# EAGLE board ftdi - Copy (EAGLE 6.5.0)
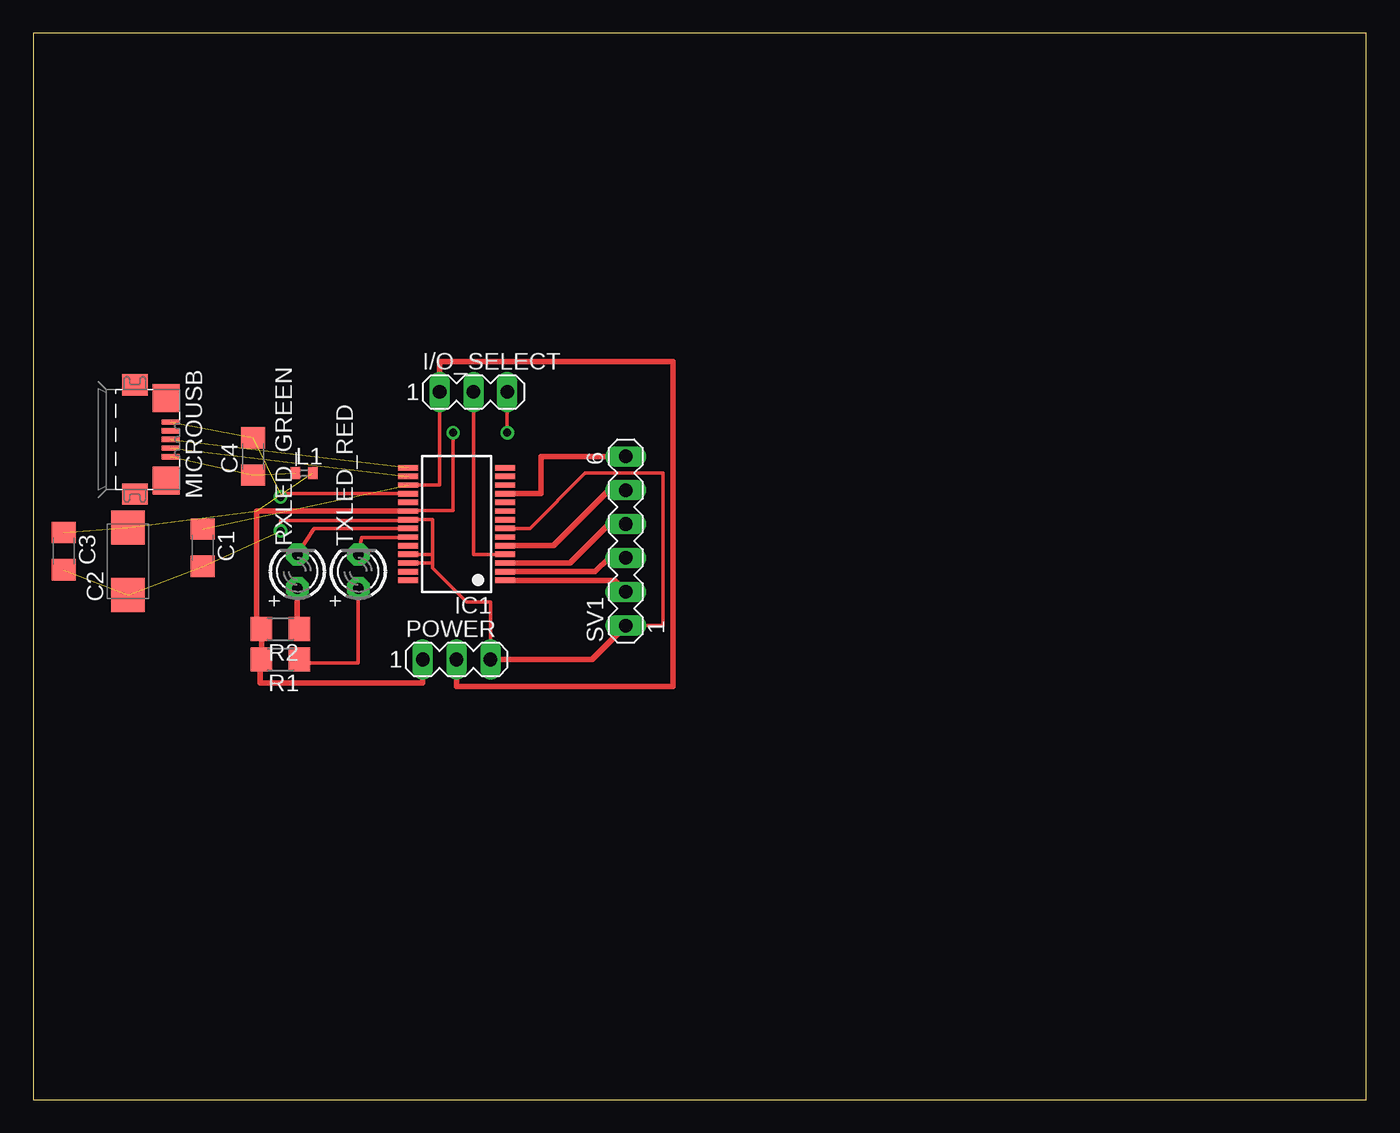
[diagram p0: board, top side]
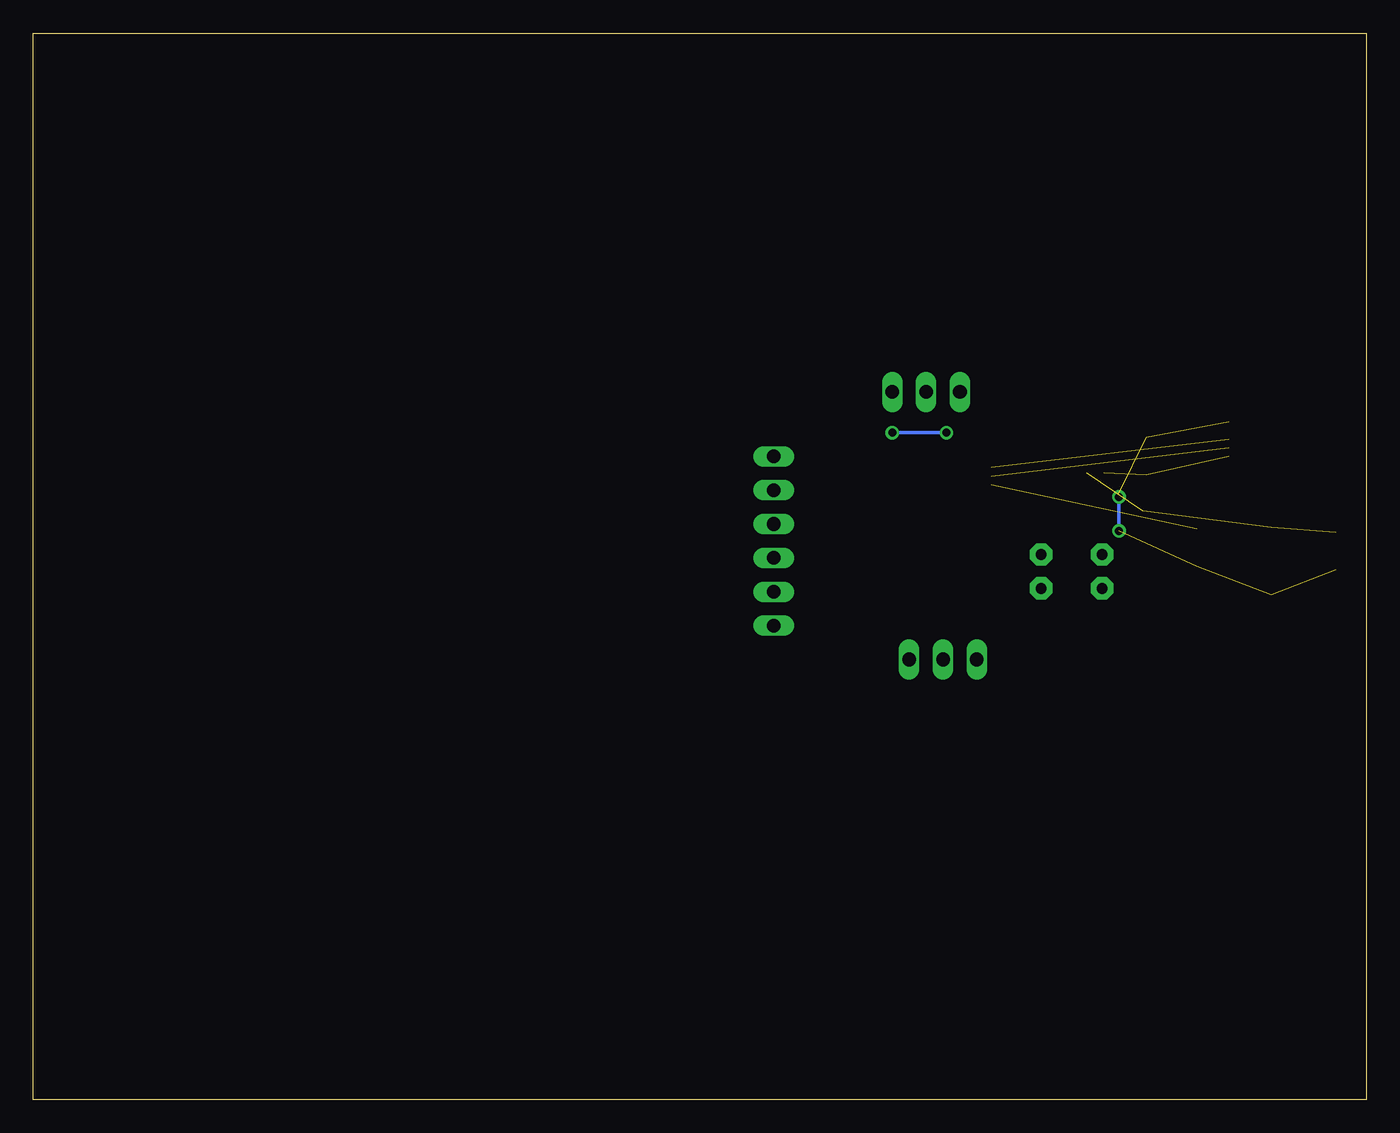
[diagram p1: board, bottom side, seen from below]

Size 100 x 80 mm. Coordinates in mm from the lower left corner, seen from the top.
Outline: 0,0 100,0 100,80 0,80 0,0
Copper layers (1*16): Top 0.035mm / dielectric 1.5mm / Bottom 0.035mm
Design rules "default": minimum track width 10mil, minimum drill 24mil, track to track 8mil, track to pad 8mil, pad to pad 8mil, via to via 8mil, smd to smd 8mil, copper to edge 40mil, drill to drill 8mil, minimum pad ring 10mil, minimum via ring 8mil, stop-mask expansion 4mil, vias tented up to drill 0mil, thermal gap 10mil

## Footprints (pad centres in the part's own frame; a part is rotated, then mirrored left to right if it is on the bottom)
C1206 = smd 1.6 x 1.8: 1 -1.4,0; 2 1.4,0
C/6032-28R = smd 2.55 x 2.5: + 2.525,0; - -2.525,0
MA03-1 = drill 1.016 long: 1 -2.54,0; 2 0,0; 3 2.54,0
SSOP28 = smd 0.4 x 1.5: 1 -4.225,-3.625; 2 -3.575,-3.625; 3 -2.925,-3.625; 4 -2.275,-3.625; 5 -1.625,-3.625; 6 -0.975,-3.625; 7 -0.325,-3.625; 8 0.325,-3.625; 9 0.975,-3.625; 10 1.625,-3.625; 11 2.275,-3.625; 12 2.925,-3.625; 13 3.575,-3.625; 14 4.225,-3.625; 15 4.225,3.625; 16 3.575,3.625; 17 2.925,3.625; 18 2.275,3.625; 19 1.625,3.625; 20 0.975,3.625; 21 0.325,3.625; 22 -0.325,3.625; 23 -0.975,3.625; 24 -1.625,3.625; 25 -2.275,3.625; 26 -2.925,3.625; 27 -3.575,3.625; 28 -4.225,3.625
0402 = smd 0.7 x 0.9: 1 -0.65,0; 2 0.65,0
ZX62R-B-5P = smd 1.35 x 0.4: 1 2.675,-1.3; 2 2.675,-0.65; 3 2.675,0; 4 2.675,0.65; 5 2.675,1.3 | smd 1.9 x 1.6: M1 0,-4.1; M2 0,4.1 | smd 2 x 2.1: M3 2.35,3.1; M4 2.35,-3.1
R1206 = smd 1.6 x 1.803: 1 -1.422,0; 2 1.422,0
LED3MM = drill 0.813 pad 1.676 octagon: A -1.27,0; K 1.27,0
MA06-1 = drill 1.016 long: 1 -6.35,0; 2 -3.81,0; 3 -1.27,0; 4 1.27,0; 5 3.81,0; 6 6.35,0

## Placement (x,y rotation side)
C1  100nF  [C1206]  12.7,41.4 270 top
C2  4.7uF TANTALUM  [C/6032-28R]  7.11,40.39 90 top
C3  100nF  [C1206]  2.29,41.15 270 top
C4  10nF  [C1206]  16.51,48.26 90 top
I/O_SELECT  [MA03-1]  33.02,53.09 0 top
IC1  FT232RL  [SSOP28]  31.75,43.18 90 top
L1  Ferrite bead  [0402]  20.32,46.99 0 top
MICROUSB  MICRO-USB-ZX62R-B-5P  [ZX62R-B-5P]  7.62,49.53 0 top
POWER  [MA03-1]  31.75,33.02 0 top
R1  270ohm  [R1206]  18.54,33.02 180 top
R2  270ohm  [R1206]  18.54,35.31 180 top
RXLED_GREEN  [LED3MM]  19.81,39.62 90 top
SV1  [MA06-1]  44.45,41.91 90 top
TXLED_RED  [LED3MM]  24.38,39.62 90 top

## Library data of the parts
C1-C4 R1 R2 RXLED_GREEN TXLED_RED = adafruit
I/O_SELECT POWER SV1 = con-lstb; OC_FARNELL: unknown; OC_NEWARK: unknown
IC1 = ftdichip; MPN: FT232RL; OC_FARNELL: 1146032; OC_NEWARK: 91K9918
L1 = inductors
MICROUSB = con-hirose

## Nets
3.3V: C1.1 I/O_SELECT.1 IC1.17 POWER.2
GND: C1.2 C2.- C3.2 C4.2 IC1.7 IC1.18 IC1.21 IC1.25 IC1.26 MICROUSB.5 POWER.3 SV1.1
N$1: IC1.1 SV1.2
N$2: IC1.16 MICROUSB.2
N$3: IC1.15 MICROUSB.3
N$4: IC1.23 TXLED_RED.K
N$5: C4.1 L1.1 MICROUSB.1
N$6: I/O_SELECT.2 IC1.4
N$7: R1.1 TXLED_RED.A
N$8: R2.1 RXLED_GREEN.A
N$9: IC1.2 SV1.3
N$10: IC1.3 SV1.4
N$11: IC1.5 SV1.5
N$12: IC1.11 SV1.6
RXLED_RED: IC1.22 RXLED_GREEN.K
VCC: C2.+ C3.1 I/O_SELECT.3 IC1.20 L1.2 POWER.1 R1.2 R2.2

## Tracks (layer width: path | path; a pad name or v marks a point on that pad's centre or on a via)
3.3V  (1 unrouted)
  Top 0.254: IC1.17 30.48,46.1 I/O_SELECT.1
  Top 0.406: POWER.2 31.75,30.99 48.01,30.99 48.01,55.37 30.48,55.37 I/O_SELECT.1
GND  (via drill 0.6)  (5 unrouted)
  Top 0.254: IC1.7 37.27,42.85 41.4,46.99 47.24,46.99 47.24,35.56 SV1.1 | 29.97,40.91 29.97,43.51 IC1.21 27.94,43.43 18.54,43.43 v18.54,42.67 | 29.97,40.91 29.97,40.26 | 29.97,40.26 29.97,39.88 32.51,37.34 34.29,37.34 POWER.3 | IC1.26 29.97,40.26 | IC1.25 29.97,40.91 | v18.54,45.21 18.54,45.47 28.11,45.47 IC1.18
  Top 0.406: POWER.3 41.91,33.02 SV1.1
  Bottom 0.254: v18.54,42.67 v18.54,45.21
N$1
  Top 0.406: IC1.1 43.59,38.95 SV1.2
N$2  (1 unrouted)
N$3  (1 unrouted)
N$4
  Top 0.254: TXLED_RED.K 24.64,42.16 28.12,42.16 IC1.23
N$5  (2 unrouted)
N$6
  Top 0.254: I/O_SELECT.2 33.02,40.89 35.38,40.89 IC1.4
N$7
  Top 0.254: TXLED_RED.A 24.38,32.77 19.96,32.77 R1.1
N$8
  Top 0.406: R2.1 19.81,35.31 RXLED_GREEN.A
N$9
  Top 0.406: IC1.2 42.15,39.6 43.18,40.64 SV1.3
N$10
  Top 0.406: IC1.3 40.26,40.26 43.18,43.18 SV1.4
N$11
  Top 0.406: IC1.5 39.02,41.55 43.18,45.72 SV1.5
N$12
  Top 0.406: IC1.11 38.1,45.45 38.1,48.26 SV1.6
RXLED_RED
  Top 0.254: IC1.22 21.08,42.85 RXLED_GREEN.K
VCC  (via drill 0.6)  (3 unrouted)
  Top 0.254: v31.5,50.04 31.5,44.2 28.19,44.2 IC1.20 | v35.56,50.04 I/O_SELECT.3
  Top 0.406: R2.2 R1.2 | R1.2 17.02,33.02 17.02,31.24 29.21,31.24 POWER.1 | IC1.20 16.76,44.16 16.76,35.81 17.12,35.81 R1.2
  Bottom 0.254: v31.5,50.04 v35.56,50.04